# Altium PCB Teeth_Radiology_PCB.PcbDoc (part 1 of 2)
Units mm, origin at the board's own origin, x right, y up, seen from the top; angles counter-clockwise.
Board outline 199.64 x 96.9 mm, 2 copper layers (Top Layer, Bottom Layer); 127 components, 118 nets, 427 pads, 81 vias.
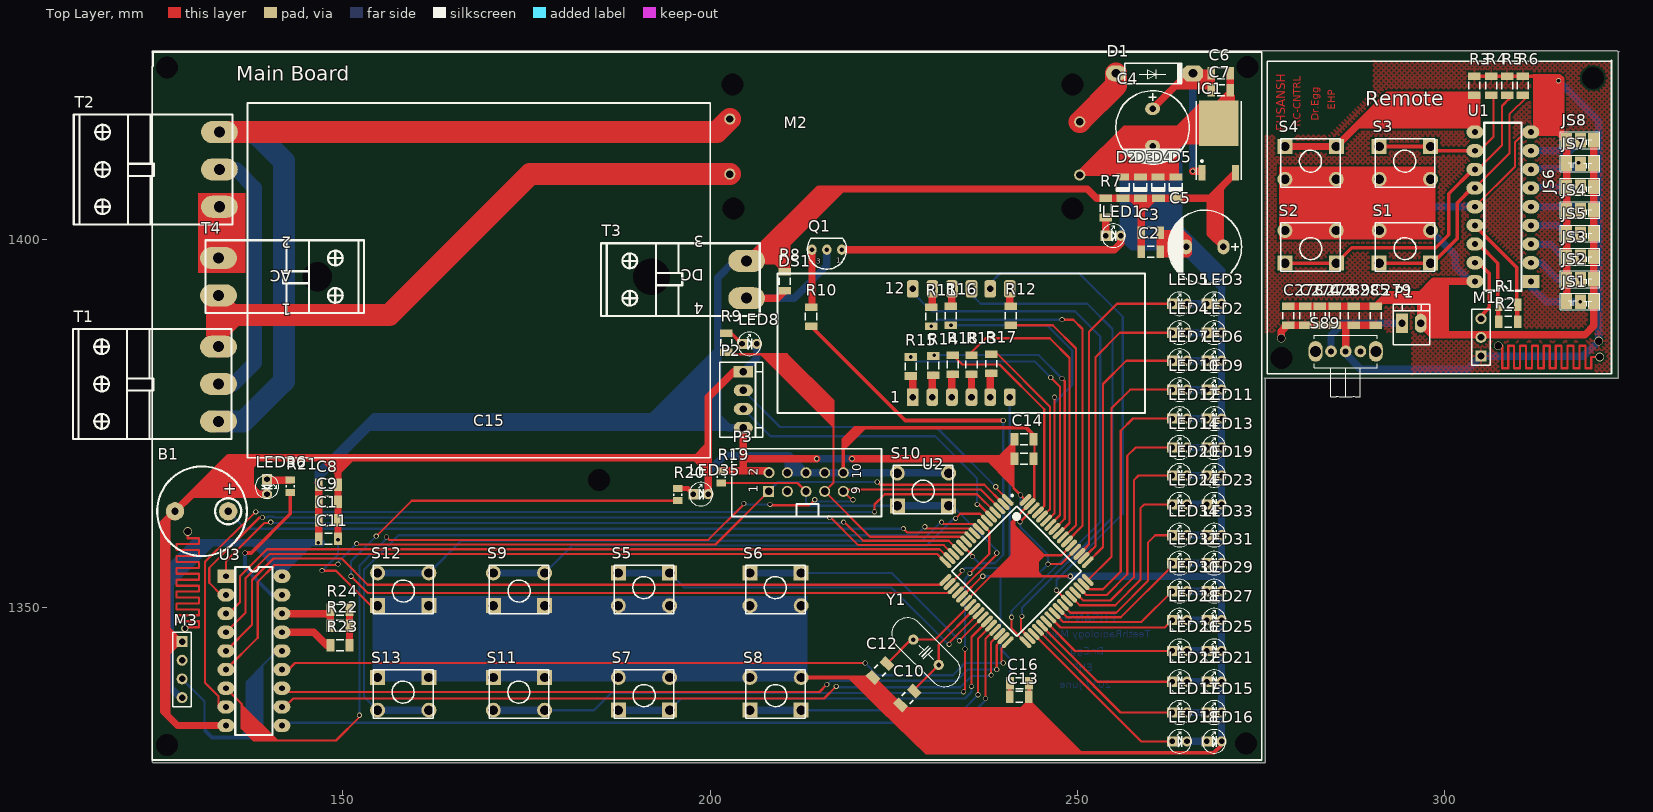
[diagram p0: Top Layer view]
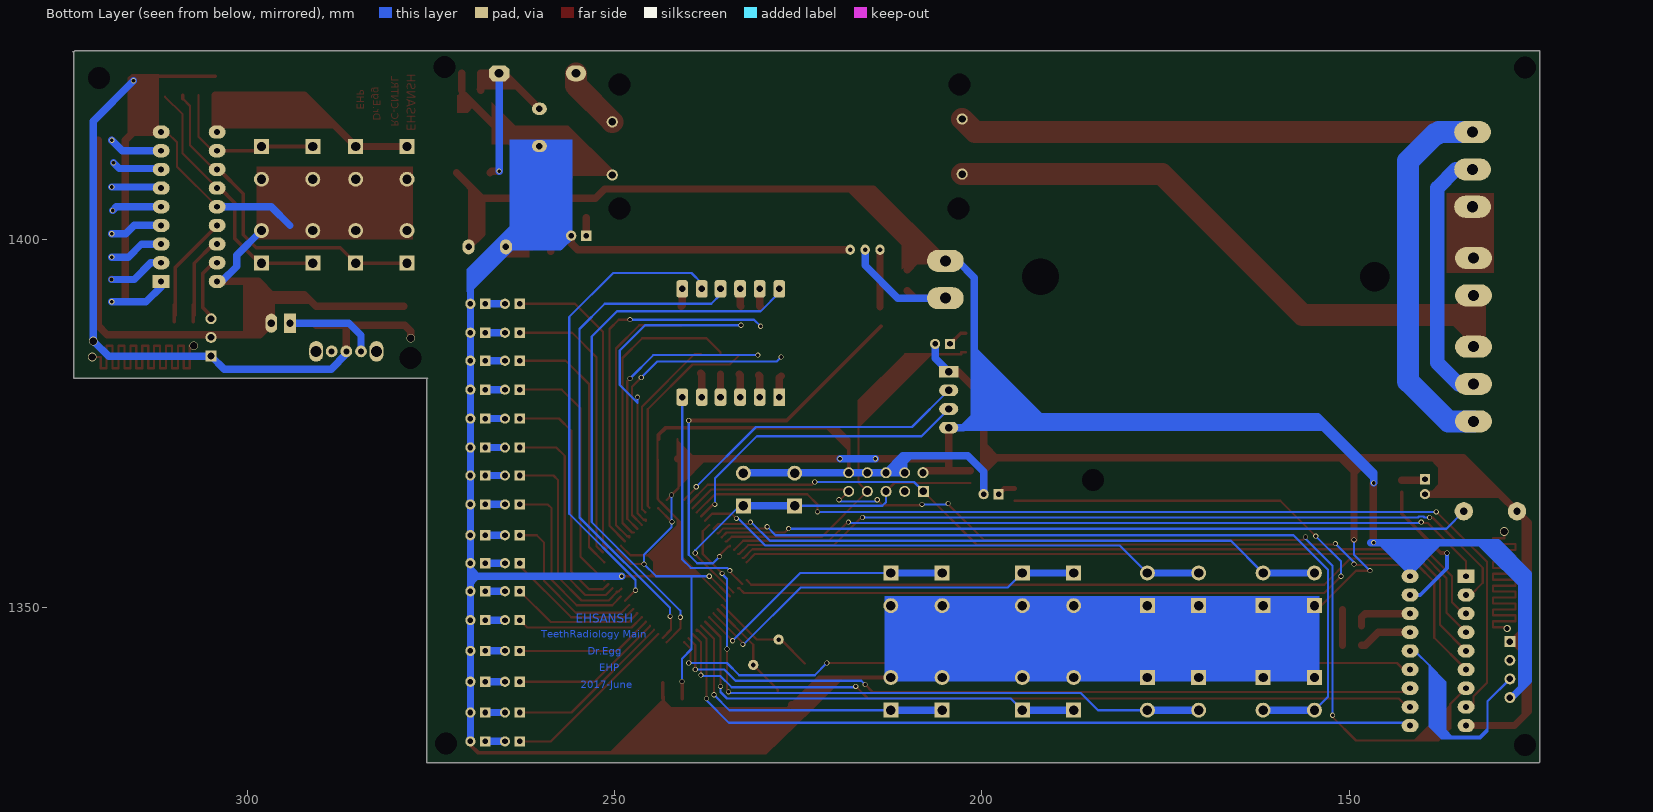
[diagram p1: Bottom Layer view, seen from below]
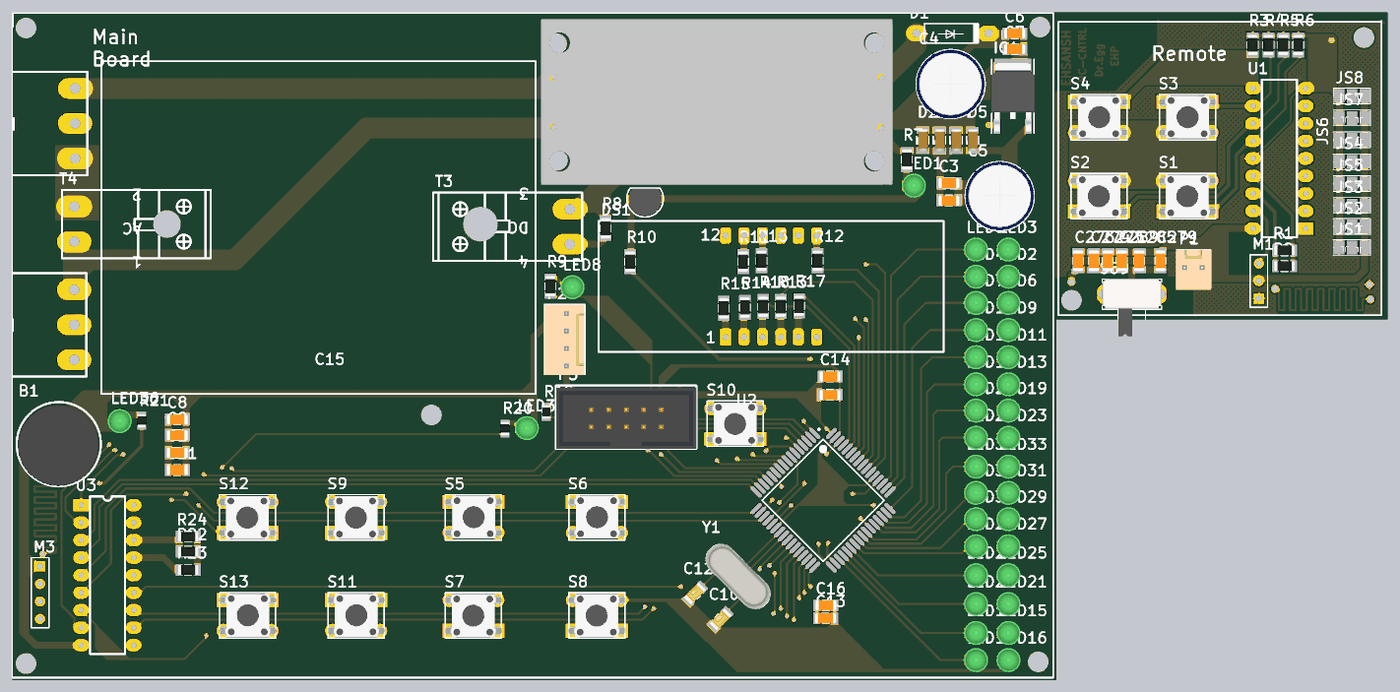
[diagram p3: 3D render of the assembled board from above, using the file's embedded part models]

## Layer stack, top to bottom
Top Solder: solder mask 0.0102, Solder Resist, Dk 3.5
Top Layer: signal copper 0.0356
Dielectric 1: dielectric 0.32, FR-4, Dk 4.8
Bottom Layer: signal copper 0.0356
Bottom Solder: solder mask 0.0102, Solder Resist, Dk 3.5

## Board outline
323.723,1425.575 323.596,1425.448 323.596,1381.125 275.463,1381.125 275.59,1380.998 275.59,1328.801 124.206,1328.801 124.079,1328.928 124.079,1425.702 323.469,1425.702 323.596,1425.575
board region "Default Layer Stack Region": 275.59,1425.702 323.469,1425.702 323.596,1425.575 323.723,1425.575 323.596,1425.448 323.596,1381.125 275.463,1381.125 275.59,1380.998 275.59,1328.801
board region "Default Layer Stack Region": 275.59,1328.801 124.206,1328.801 124.079,1328.928 124.079,1425.702 275.59,1425.702

## Design rules (kind name [scope] priority, off if disabled: settings)
Clearance [All] p1: gap=0.254
PolygonConnect [All] p1: connectstyle=Relief reliefconductorwidth=0.254 reliefentries=4 polygonreliefangle="90 Angle" airgapwidth=0.254
RoutingVias [All] p1: holewidth=0.5 width=0.7 viastyle="Through Hole" minholewidth=0.5 minwidth=0.7 maxholewidth=0.5 maxwidth=0.7
SolderMaskExpansion [All] p1: expansion=0.102
Width [All] p1: maxlimit=10 minlimit=0.254 preferedwidth=5
30 further rules are at their usual default settings.

## Components (designator, comment, footprint, x,y, rotation, side; value= is the part's Value field where it differs from the comment)
B1 "Buzzer" Buzzer 130.556,1363.345 r0 top
C1 "10u" SMD_CAP_1206 146.756,1361.821 r0 top
C2 "10u" SMD_CAP_1206 258.676,1398.397 r0 top
C3 "100nF" SMD_CAP_1206 258.676,1400.937 r0 top
C4 "1uF" "cap 04" 260.223,1415.288 r90 top
C5 "1uF" "cap 04" 267.335,1399.032 r0 top
C6 "10u" SMD_CAP_1206 268.224,1422.654 r0 top
C7 "100nF" SMD_CAP_1206 268.224,1420.368 r0 top
C8 "10u" SMD_CAP_1206 146.756,1366.647 r0 top
C9 "100nF" SMD_CAP_1206 146.756,1364.361 r0 top
C10 "18pF" "CAP 1206 (3216X15L)" 226.858,1337.632 r45 top
C11 "100nF" SMD_CAP_1206 149.352,1359.281 r180 top
C12 "18pF" "CAP 1206 (3216X15L)" 223.139,1341.374 r45 top
C13 "10uF" SMD_CAP_1206 240.792,1337.818 r0 top
C14 "10u" SMD_CAP_1206 241.427,1372.87 r0 top
C15 "10u" SMD_CAP_1206 241.427,1370.203 r0 top
C16 "100nF" SMD_CAP_1206 240.828,1339.664 r0 top
C273 "100nF" SMD_CAP_1206 278.694,1388.364 r90 top
C274 "10u" SMD_CAP_1206 280.98,1388.364 r90 top
C275 "10u" SMD_CAP_1206 283.012,1388.364 r90 top
C279 "10u" SMD_CAP_1206 290.632,1388.364 r90 top
C285 "10u" SMD_CAP_1206 287.584,1388.364 r90 top
C289 "100nF" SMD_CAP_1206 285.044,1388.364 r90 top
D1 "1N4007" My_DO-41 265.938,1422.908 r180 top
D2 "Diode Zener SMD" DIOMELF3615N 256.159,1407.16 r90 top
D3 "Diode Zener SMD" DIOMELF3615N 258.572,1407.16 r90 top
D4 "Diode Zener SMD" DIOMELF3615N 260.985,1407.16 r90 top
D5 "Diode Zener SMD" DIOMELF3615N 263.398,1407.16 r90 top
DS1 "7Segment-4Digit-CA" 7segCA 209.169,1376.426 r0 top
IC1 "L78M05" TO-252 269.24,1412.494 r0 top
JS1 "JumperSMD 3Pin" "JumperSMD 3Pin" 319.461,1391.539 r90 top
JS2 "JumperSMD 3Pin" "JumperSMD 3Pin" 319.461,1394.587 r90 top
JS3 "JumperSMD 3Pin" "JumperSMD 3Pin" 319.461,1397.635 r90 top
JS4 "JumperSMD 3Pin" "JumperSMD 3Pin" 319.461,1403.985 r90 top
JS5 "JumperSMD 3Pin" "JumperSMD 3Pin" 319.461,1400.81 r90 top
JS6 "JumperSMD 3Pin" "JumperSMD 3Pin" 319.461,1407.16 r90 top
JS7 "JumperSMD 3Pin" "JumperSMD 3Pin" 319.461,1410.335 r90 top
JS8 "JumperSMD 3Pin" "JumperSMD 3Pin" 319.461,1413.51 r90 top
LED1 "Red" LED-3mm 254.889,1400.556 r0 top
LED2 "Red" LED-3mm 268.605,1387.348 r0 top
LED3 "Red" LED-3mm 268.605,1391.285 r0 top
LED4 "Red" LED-3mm 263.906,1387.348 r0 top
LED5 "Red" LED-3mm 263.906,1391.285 r0 top
LED6 "Red" LED-3mm 268.605,1383.538 r0 top
LED7 "Red" LED-3mm 263.906,1383.538 r0 top
LED8 "Red" LED-3mm 205.359,1385.824 r0 top
LED9 "Red" LED-3mm 268.605,1379.601 r0 top
LED10 "Red" LED-3mm 263.906,1379.601 r0 top
LED11 "Red" LED-3mm 268.605,1375.664 r0 top
LED12 "Red" LED-3mm 263.906,1375.664 r0 top
LED13 "Red" LED-3mm 268.605,1371.727 r0 top
LED14 "Red" LED-3mm 263.906,1371.727 r0 top
LED15 "Red" LED-3mm 268.605,1335.659 r0 top
LED16 "Red" LED-3mm 268.605,1331.722 r0 top
LED17 "Red" LED-3mm 263.906,1335.659 r0 top
LED18 "Red" LED-3mm 263.906,1331.722 r0 top
LED19 "Red" LED-3mm 268.605,1367.917 r0 top
LED20 "Red" LED-3mm 263.906,1367.917 r0 top
LED21 "Red" LED-3mm 268.605,1339.85 r0 top
LED22 "Red" LED-3mm 263.906,1339.85 r0 top
LED23 "Red" LED-3mm 268.605,1363.98 r0 top
LED24 "Red" LED-3mm 263.906,1363.98 r0 top
LED25 "Red" LED-3mm 268.605,1344.041 r0 top
LED26 "Red" LED-3mm 263.906,1344.041 r0 top
LED27 "Red" LED-3mm 268.605,1348.232 r0 top
LED28 "Red" LED-3mm 263.906,1348.232 r0 top
LED29 "Red" LED-3mm 268.605,1352.169 r0 top
LED30 "Red" LED-3mm 263.906,1352.169 r0 top
LED31 "Red" LED-3mm 268.605,1355.979 r0 top
LED32 "Red" LED-3mm 263.906,1355.979 r0 top
LED33 "Red" LED-3mm 268.605,1359.789 r0 top
LED34 "Red" LED-3mm 263.906,1359.789 r0 top
LED35 "Red" LED-3mm 198.755,1365.377 r0 top
LED36 "Red" LED-3mm 139.7,1366.393 r270 top
M1 "FSK_Transmit" FSK_TRA 304.927,1384.173 r90 top
M2 "220-12 Medule" "AC-DC 220-12" 200.66,1400.81 r0 top
M3 "FSK_Receive" FSK_RES 128.143,1342.771 r270 top
P1 "LHWR" "Polarized Header 2" 295.458,1388.872 r0 top
P2 "LHWR" "Polarized Header 4" 204.724,1378.204 r270 top
P3 "BoxHeader 2x5" "Box Header 2x5" 215.646,1365.758 r90 top
Q1 "C945" C945 215.9,1398.651 r0 top
R1 "10K" "RES 1206 (3216X08L)" 309.936,1391.158 r180 top
R2 "10K" "RES 1206 (3216X08L)" 309.936,1388.872 r180 top
R3 "10K" "RES 1206 (3216X08L)" 304.038,1422.273 r270 top
R4 "10K" "RES 1206 (3216X08L)" 306.324,1422.273 r270 top
R5 "10K" "RES 1206 (3216X08L)" 308.483,1422.273 r270 top
R6 "10K" "RES 1206 (3216X08L)" 310.642,1422.273 r270 top
R7 "330" "RES 1206 (3216X08L)" 253.873,1405.636 r270 top
R8 "1K" "RES 1206 (3216X08L)" 210.185,1393.063 r90 top
R9 "330" "RES 1206 (3216X08L)" 202.184,1384.681 r90 top
R10 "330" "RES 1206 (3216X08L)" 213.741,1388.237 r90 top
R11 "330" "RES 1206 (3216X08L)" 230.124,1388.237 r90 top
R12 "330" "RES 1206 (3216X08L)" 240.919,1388.364 r90 top
R13 "330" "RES 1206 (3216X08L)" 235.585,1384.3 r270 top
R14 "330" "RES 1206 (3216X08L)" 230.378,1384.173 r270 top
R15 "330" "RES 1206 (3216X08L)" 227.33,1384.046 r270 top
R16 "330" "RES 1206 (3216X08L)" 232.791,1388.364 r90 top
R17 "330" "RES 1206 (3216X08L)" 238.252,1384.427 r270 top
R18 "330" "RES 1206 (3216X08L)" 233.045,1384.3 r270 top
R19 "10K" "RES 0805 (2012X06L)" 201.549,1368.552 r270 top
R20 "330" "RES 0805 (2012X06L)" 195.58,1364.488 r90 top
R21 "330" "RES 0805 (2012X06L)" 142.875,1365.631 r90 top
R22 "1K" "RES 1206 (3216X08L)" 148.336,1347.47 r0 top
R23 "330" "RES 1206 (3216X08L)" 150.932,1344.803 r180 top
R24 "1K" "RES 1206 (3216X08L)" 148.336,1349.629 r0 top
S1 "Switch PB" "Switch - Push to On" 294.569,1399.032 r180 top
S2 "Switch PB" "Switch - Push to On" 281.742,1399.032 r180 top
S3 "Switch PB" "Switch - Push to On" 294.569,1410.462 r0 top
S4 "Switch PB" "Switch - Push to On" 281.742,1410.462 r0 top
S5 "Switch PB" "Switch - Push to On" 191.008,1352.423 r0 top
S6 "Switch PB" "Switch - Push to On" 208.915,1352.423 r0 top
S7 "Switch PB" "Switch - Push to On" 191.008,1338.199 r180 top
S8 "Switch PB" "Switch - Push to On" 208.915,1338.199 r180 top
S9 "Switch PB" "Switch - Push to On" 173.99,1352.423 r180 top
S10 "Switch PB" "Switch - Push to On" 228.981,1366.012 r180 top
S11 "Switch PB" "Switch - Push to On" 173.99,1338.199 r0 top
S12 "Switch PB" "Switch - Push to On" 158.242,1352.423 r180 top
S13 "Switch PB" "Switch - Push to On" 158.242,1338.199 r0 top
S89 "Switch SPDT_Subminiator" "SPDT Subminiator" 286.512,1384.808 r180 top
T1 "PHONIX3" PHONIX3 133.096,1375.283 r90 top
T2 "PHONIX3" PHONIX3 133.223,1404.493 r90 top
T3 "PHONIX2" PHONIX2 204.978,1397.127 r90 top
T4 "PHONIX2" PHONIX2 133.096,1392.428 r270 top
U1 "PT2262" PT2262 312.222,1419.733 r180 top
U2 "ATmega64A-AU" 64A_M 241.717,1354.904 r315 top
U3 "PT2272" DIP18 134.112,1354.201 r0 top
Y1 "16MHz" "XTAL Small" 229.398,1343.855 r135 top

## Footprints (in the part's own frame and the unit in brackets; to place one, negate y for a bottom-side part, rotate by r counter-clockwise, add the part's x,y. Pads: shape width x height; smd on the part's side, far side on the other; paste and mask are expansions set on the pad)
7segCA [mm] "7seg-CA; 12 Leads"
  rect 1.6x2.4 hole 0.9: 1(18.415,2.159)
  rrect50% 1.6x2.4 hole 0.9: 2(21.082,2.159) 3(23.749,2.159) 4(26.416,2.159) 5(28.956,2.159) 6(31.623,2.159) 7(31.623,16.891) 8(28.956,16.891) 9(26.416,16.891) 10(23.749,16.891) 11(21.082,16.891) 12(18.415,16.891)
  silkscreen extent 0,0 50.04,19
64A_M [mm] "Thin QFP, 64-Leads, Body 14x14mm, Pitch 0.8mm, IPC Low Density"
  oval 2.05x0.6 smd: 1(-7.7,6) 2(-7.7,5.2) 3(-7.7,4.4) 4(-7.7,3.6) 5(-7.7,2.8) 6(-7.7,2) 7(-7.7,1.2) 8(-7.7,0.4) 9(-7.7,-0.4) 10(-7.7,-1.2) 11(-7.7,-2) 12(-7.7,-2.8) 13(-7.7,-3.6) 14(-7.7,-4.4) 15(-7.7,-5.2) 16(-7.7,-6) 33(7.7,-6) 34(7.7,-5.2) 35(7.7,-4.4) 36(7.7,-3.6) 37(7.7,-2.8) 38(7.7,-2) 39(7.7,-1.2) 40(7.7,-0.4) 41(7.7,0.4) 42(7.7,1.2) 43(7.7,2) 44(7.7,2.8) 45(7.7,3.6) 46(7.7,4.4) 47(7.7,5.2) 48(7.7,6)
  oval 0.6x2.05 smd: 17(-6,-7.7) 18(-5.2,-7.7) 19(-4.4,-7.7) 20(-3.6,-7.7) 21(-2.8,-7.7) 22(-2,-7.7) 23(-1.2,-7.7) 24(-0.4,-7.7) 25(0.4,-7.7) 26(1.2,-7.7) 27(2,-7.7) 28(2.8,-7.7) 29(3.6,-7.7) 30(4.4,-7.7) 31(5.2,-7.7) 32(6,-7.7) 49(6,7.7) 50(5.2,7.7) 51(4.4,7.7) 52(3.6,7.7) 53(2.8,7.7) 54(2,7.7) 55(1.2,7.7) 56(0.4,7.7) 57(-0.4,7.7) 58(-1.2,7.7) 59(-2,7.7) 60(-2.8,7.7) 61(-3.6,7.7) 62(-4.4,7.7) 63(-5.2,7.7) 64(-6,7.7)
  silkscreen extent -7.82,-6.25 6.25,6.97, body extent -7,-7 7,7, height 1.2
"AC-DC 220-12" [mil]
  round 60 hole 39.37: 0(1955,600) 1(1955,315) 2(80,615) 3(80,320)
  round 60 hole 118.11: 4(1915,135) 5(1915,800) 6(95,800) 7(100,135)
  body extent 6,-5 2014,940, height 118
"Box Header 2x5" [mm]
  rect 1.5x1.5 hole 1: 1(-0.006,7.666)
  round 1.5 hole 1: 2(2.54,7.62) 3(-0.006,5.126) 4(2.534,5.126) 5(-0.006,2.586) 6(2.534,2.586) 7(-0.006,0.046) 8(2.534,0.046) 9(-0.006,-2.494) 10(2.534,-2.494)
  silkscreen extent -3.42,-7.7 5.8,12.7, body extent -3.4,-7.7 5.7,12.66, height 9.43
Buzzer [mm] "Magnetic Transducer"
  round 2.5 hole 1: 1(3.859,-0.297) 2(-3.38,-0.297)
  silkscreen extent -5.79,-6.4 6.4,5.8, body extent -5.67,-6.39 6.17,5.45, height 6.98
C945 [mil] "NPN Transistor"
  oval 50x55 hole 25: 1(80,0) 2(0,0) 3(-80,0)
  silkscreen extent -105,-105 105,61, body extent -94,-96 95,58, height 315
"cap 04" [mil]
  oval 65x80 hole 35: 1(100,0) 2(-100,0)
  silkscreen extent -197,-197 197,197, body extent -198,-197 198,199, height 513
"CAP 1206 (3216X15L)" [mm] "Chip Capacitor, 2-Leads, Body 3.2x1.6mm, IPC High Density"
  rect 1.15x1.75 smd: 1(-1.325,0) 2(1.325,0)
  silkscreen extent -0.35,-0.77 0.35,0.77, body extent -1.6,-0.8 1.6,0.8, height 1
DIOMELF3615N [mm] "MELF Diode, 2-Leads, Body 3.6x1.5mm, IPC Medium Density"
  rect 1x1.75 smd: 1(-1.495,-0.03) 2(1.38,-0.005)
  silkscreen extent -0.55,-0.87 0.55,0.87, body extent -1.61,-0.83 1.54,0.67, height 1.45
DIP18 [mm]
  rect 2.3x1.8 hole 0.8: 1(0,0)
  oval 2.3x1.8 hole 0.8: 2(0,-2.54) 3(0,-5.08) 4(0,-7.62) 5(0,-10.16) 6(0,-12.7) 7(0,-15.24) 8(0,-17.78) 9(0,-20.32) 10(7.62,-20.32) 11(7.62,-17.78) 12(7.62,-15.24) 13(7.62,-12.7) 14(7.62,-10.16) 15(7.62,-7.62) 16(7.62,-5.08) 17(7.62,-2.54) 18(7.62,0)
  silkscreen extent 1.27,-21.59 6.35,1.27
FSK_RES [mm]
  rect 1.5x1.5 hole 0.9: 0(-2.54,0)
  round 1.5 hole 0.9: 1(0,0) 2(2.54,0) 3(5.08,0)
  silkscreen extent -3.81,-1.27 6.35,1.27
FSK_TRA [mm]
  rect 1.5x1.5 hole 0.9: 0(0,0)
  round 1.5 hole 0.9: 1(2.54,0) 2(5.08,0)
  silkscreen extent -1.27,-1.27 6.35,1.27
"JumperSMD 3Pin" [mm]
  rect 2x1.5 smd: 1(0.051,2.87) 2(0.025,1.016) 3(0.051,-0.813)
  silkscreen extent -1.09,-1.66 1.18,3.77
LED-3mm [mil]
  rect 55x55 hole 30: 1(-40,0)
  round 55 hole 30: 2(40,0)
  silkscreen extent -63,-63 63,63, body extent -69,-69 69,69, height 154
My_DO-41 [mil]
  oval 110x85 hole 47.24: A(420.71,10)
  oct 110x85 hole 47.24: K(8.9,10)
  silkscreen extent 64,-45 375,65
PHONIX2 [mm]
  oval 3x5 hole 1.5: 1(0,0) 2(-5.08,0)
  silkscreen extent -7.49,-1.78 2.41,19.81
PHONIX3 [mm]
  oval 3x5 hole 1.5: 1(0,0) 2(5.08,0) 3(10.16,0)
  silkscreen extent -2.41,-1.78 12.57,19.81
"Polarized Header 2" [mm]
  rect 1.6x2.6 hole 1: 1(-1.28,-0.23)
  oval 1.6x2.6 hole 1: 2(1.26,-0.23)
  silkscreen extent -2.47,-3.15 2.48,2.37, body extent -2.57,-3.43 2.51,2.37, height 10.75
"Polarized Header 4" [mm]
  rect 1.6x2.6 hole 1: 1(-3.84,-0.2)
  oval 1.6x2.6 hole 1: 2(-1.3,-0.2) 3(1.24,-0.2) 4(3.78,-0.2)
  silkscreen extent -5.1,-3.42 5.05,2.45, body extent -5.06,-3.42 5.1,2.38, height 10.75
PT2262 [mm]
  rect 2.3x1.8 hole 0.8: 1(0.508,25.4)
  oval 2.3x1.8 hole 0.8: 2(0.508,22.86) 3(0.508,20.32) 4(0.508,17.78) 5(0.508,15.24) 6(0.508,12.7) 7(0.508,10.16) 8(0.508,7.62) 9(0.508,5.08) 10(8.128,5.08) 11(8.128,7.62) 12(8.128,10.16) 13(8.128,12.7) 14(8.128,15.24) 15(8.128,17.78) 16(8.128,20.32) 17(8.128,22.86) 18(8.128,25.4)
  silkscreen extent 1.78,3.81 6.86,26.67
"RES 0805 (2012X06L)" [mm] "Chip Resistor, 2-Leads, Body 2.0x1.3mm, IPC High Density _ (0.100 W)"
  rect 0.95x1.3 smd: 1(0,0) 2(1.65,0)
  silkscreen extent 0.67,-0.55 0.97,0.55, body extent -0.19,-0.63 1.84,0.64, height 0.6
"RES 1206 (3216X08L)" [mm] "Chip Resistor, 2-Leads, Body 3.2x1.6mm, IPC High Density _ (0.125 W)"
  rect 1.05x1.7 smd: 1(0,0) 2(2.596,0)
  silkscreen extent 0.8,-0.75 1.8,0.75, body extent -0.23,-0.76 2.82,0.76, height 0.6
SMD_CAP_1206 [mm]
  rect 1.05x1.7 smd: 1(0,0) 2(2.596,0)
  silkscreen extent 0.8,-0.75 1.8,0.75, body extent -0.22,-0.77 2.82,0.75, height 0.75
"SPDT Subminiator" [mm] "Subminiator SPDT switch"
  round 1.6 hole 0.8: 1(2,0) 2(0,0) 3(-2,0)
  oval 1.9x2.8 hole 1.5: M2(-4.1,0) M2(4.1,0)
  silkscreen extent -4.3,-2.2 4.3,6.2, body extent -4.31,-2.28 4.3,6.09, height 4.7
"Switch - Push to On" [mil]
  rect 80x80 hole 50: 1(-137.5,87.5) 1(137.5,87.5)
  round 80 hole 50: 2(-137.5,-87.5) 2(137.5,-87.5)
  silkscreen extent -160,-130 160,130, body extent -155,-121 157,123, height 205
TO-252 [mm] "D-PAK/TO-252-AA; 3 Leads (1 Cropped); Body 10.1 (inc. leads) x 6.6 mm (LxW max)"
  rect 1x2.1 smd: 1(-2.285,-3.375) 3(2.285,-3.375)
  rect 5.4x6.2 smd: 4(0,3.375)
  silkscreen extent -3.08,-4.32 3.09,6.38, body extent -3.27,-4.11 3.27,5.83, height 2.39
"XTAL Small" [mil]
  round 55 hole 25: 1(-96.06,0) 2(96.06,0)
  silkscreen extent -225,-85 225,85, body extent -226,-89 226,89, height 140

## Part data
C1 C2 C3 C6 C7 C8 C9 C10 C11 C12 C13 C14 C15 C16 C273 C274 C275 C279 C285 C289: library part Cap-Bipolar, "Bipolar Capacitor"
C4 C5: library part Cap-Polar, "Polar Capacitor"
D1: "1 Amp Diode"
DS1: library part 7Seg-4Digit-CA, "7-Segment Display: CA"
IC1: "Precision 500mA Regulator"
LED1 LED2 LED3 LED4 LED5 LED6 LED7 LED8 LED9 LED10 LED11 LED12 LED13 LED14 LED15 LED16 LED17 LED18 LED19 LED20 LED21 LED22 LED23 LED24 LED25 LED26 LED27 LED28 LED29 LED30 LED31 LED32 LED33 LED34 LED35 LED36: library part LED, "LED"
P1: library part "2pin LHWR"
P2: library part "4pin LHWR"
Q1: "NPN Transistor"
R1 R2 R3 R4 R5 R6 R7 R8 R9 R10 R11 R12 R13 R14 R15 R16 R17 R18 R19 R20 R21 R22 R23 R24: library part Resistor, "Resistor"
S1 S2 S3 S4 S5 S6 S7 S8 S9 S10 S11 S12 S13: "Push Button Switch"
S89: "Subminiator SPDT Switch"
U2: "8-bit AVR Microcontroller, 64KB Flash, 2KB EEPROM, 4KB SRAM, 64-pin TQFP, Industrial Grade (-40°C to 85°C)"
Y1: library part XTAL, "XTAL Crystal"

## Free pads (board coordinates)
  round 1.524 hole 5: 0(192.024,1394.968)
  round 1.524 hole 4: 1(146.558,1394.968)
  round 1.524 hole 3: 2(272.923,1331.468) 4(273.177,1423.543) 5(126.111,1423.416) 6(126.111,1331.214) 7(184.912,1367.282) 8(320.167,1422.019) 9(277.749,1383.919)

## Via types
v1: diameter 0.7, hole 0.5, Top Layer to Bottom Layer, 75 vias
v2: diameter 1.2, hole 1, Top Layer to Bottom Layer, 5 vias
v3: diameter 1, hole 0.7, Top Layer to Bottom Layer, 1 vias

## Nets (pads, with @x,y where several pads share a name; then routed paths per layer and width w, separated by ;. In a path a pad name is that pad's centre, name@x,y a point inside that pad or via, vN(x,y) a via of type N, cw(c..) or ccw(c..) an arc to the next point about the centre after c; other vN are vias at no path point)
+12: C4.1 C6.1 C7.1 D1.K IC1.1 | length 26.8
  Top Layer w1: C4.1@260.223,1417.828 265.049,1422.654 D1.K@265.712,1422.654 C6.1@268.097,1422.654 ; v1(265.712,1409.347) 266.727,1409.347 IC1.1@266.955,1409.119 ; C7.1@268.224,1420.368 C6.1@268.224,1422.654
  Bottom Layer w1: v1(265.712,1409.347) D1.K@265.712,1422.654
A0: U2.13 U3.1 | length 105.2
  Top Layer w0.3: U3.1@134.112,1354.201 134.112,1356.233 139.327,1361.448 140.089,1361.448 v1(140.208,1361.567) ; v1(218.186,1361.567) 218.313,1361.567 220.853,1359.027 232.503,1359.027 U2.13@233.727,1357.804
  Bottom Layer w0.3: v1(140.208,1361.567) 140.327,1361.448 v1@217.924,1361.448
A1: U2.14 U3.2 | length 111.1
  Top Layer w0.3: U3.2@134.112,1351.661 133.477,1351.661 131.826,1353.312 131.826,1355.344 138.684,1362.202 v1(139.065,1362.202) ; v1(216.281,1362.202) 216.408,1362.202 220.172,1358.438 231.825,1358.438 233.025,1357.238 U2.14@233.161,1357.238
  Bottom Layer w0.3: v1(139.065,1362.202) 139.777,1362.202 139.896,1362.321 140.52,1362.321 140.639,1362.202 215.9,1362.202 v1@216.027,1362.329
A2: U2.15 U3.3 | length 104.7
  Top Layer w0.3: U3.3@134.112,1349.121 134.493,1349.121 136.017,1350.645 136.017,1354.201 139.7,1357.884 231.248,1357.884 232.459,1356.672 U2.15@232.595,1356.672
A3: U2.16 U3.4 | length 105.6
  Top Layer w0.3: U3.4@134.112,1346.581 136.779,1349.248 136.779,1353.947 140.081,1357.249 230.887,1357.249 U2.16@232.029,1356.106
A4: U2.17 U3.5 | length 108.4
  Top Layer w0.3: U3.5@134.112,1344.041 137.668,1347.597 137.668,1353.693 140.589,1356.614 149.86,1356.614 153.416,1353.058 231.394,1353.058 232.029,1353.693 U2.17@232.029,1353.702
A5: P3.1 U2.2 U3.6 | length 122.4
  Top Layer w0.3: U3.6@134.112,1341.501 138.43,1345.819 138.43,1353.439 140.716,1355.725 149.225,1355.725 v1(149.352,1355.852) ; v1(151.892,1358.646) 152.019,1358.519 200.747,1358.519 P3.1@207.98,1365.752 ; v1(222.758,1367.028) 223.139,1366.647 237.328,1366.647 U2.2@239.949,1364.026
  Bottom Layer w0.3: v1(149.352,1355.852) 149.352,1356.106 v1(151.892,1358.646) ; P3.1@207.98,1365.752 209.256,1367.028 v1(222.758,1367.028)
A6: P3.9 U2.3 U3.7 | length 141.2
  Top Layer w0.3: U3.7@134.112,1338.961 136.271,1336.802 136.271,1333.5 137.922,1331.849 149.098,1331.849 152.4,1335.151 v1(152.273,1335.278) ; v1(155.956,1359.535) 156.337,1359.154 199.771,1359.154 204.597,1363.98 v1(204.597,1364.107) ; v1(208.153,1363.98) 208.28,1363.853 213.487,1363.853 v1(214.249,1364.615) ; v1(219.456,1364.615) 219.277,1364.615 P3.9@218.14,1365.752 218.4,1366.012 236.832,1366.012 U2.3@239.383,1363.46
  Bottom Layer w0.3: v1(152.273,1335.278) 152.273,1355.598 156.083,1359.408 v1(155.956,1359.535) ; v1@204.724,1363.98 v1(208.153,1363.98) ; v1(214.249,1364.615) 214.249,1364.361 219.202,1364.361 v1(219.456,1364.615)
A7: U2.4 U3.8 | length 134.5
  Top Layer w0.3: U3.8@134.112,1336.421 133.096,1336.421 133.096,1337.883 131.272,1339.707 131.272,1356.187 v1(138.176,1362.964) ; v1(222.377,1362.964) 222.377,1363.98 223.774,1365.377 236.335,1365.377 U2.4@238.818,1362.895
  Bottom Layer w0.3: v1(138.176,1362.964) v1(222.377,1362.964)
D0: U2.32 U3.13 | length 103.2
  Top Layer w0.3: U3.13@141.732,1341.501 142.621,1341.501 143.51,1342.39 v1(221.107,1342.39) ; v1(239.903,1342.39) 239.649,1342.644 239.649,1344.351 U2.32@240.515,1345.217
  Bottom Layer w0.3: v1(221.107,1342.39) 222.758,1340.739 233.045,1340.739 234.696,1342.39 v1(239.903,1342.39)
D1: U2.31 U3.12 | length 103.8
  Top Layer w0.3: U3.12@141.732,1338.961 142.24,1338.453 214.884,1338.453 v1(215.9,1339.469) ; v1(239.014,1341.501) 239.014,1344.848 U2.31@239.949,1345.783
  Bottom Layer w0.3: v1(215.9,1339.469) 216.408,1339.977 230.378,1339.977 ; 229.997,1339.977 233.553,1339.977 235.077,1341.501 v1(239.014,1341.501)
D2: U2.30 U3.11 | length 104.5
  Top Layer w0.3: U3.11@141.732,1336.421 142.113,1336.421 143.256,1337.564 215.519,1337.564 v1(217.17,1339.215) ; v1(238.252,1340.739) 238.252,1345.217 U2.30@239.383,1346.348
  Bottom Layer w0.3: v1(217.17,1339.215) 217.297,1339.088 234.061,1339.088 235.585,1340.612 238.125,1340.612 v1(238.252,1340.739)
D3: U2.29 U3.10 | length 107.5
  Top Layer w0.3: U3.10@141.732,1333.881 U3.10@142.113,1334.262 ; v1(237.49,1337.564) 237.49,1345.692 238.576,1346.778 238.818,1346.778 U2.29@238.818,1346.914
  Bottom Layer w0.3: U3.10@142.113,1334.262 234.442,1334.262 237.49,1337.31 v1(237.49,1337.564)
EARTH: T1.2 T2.2 | length 35.8
  Bottom Layer w2: T1.2@133.096,1380.363 135.128,1380.363 138.049,1383.284 138.049,1407.033 135.509,1409.573 T2.2@133.223,1409.573
EX: T2.1 T4.2
GND: B1.2 C1.2 C2.2 C3.2 C4.2 C5.2 C6.2 C7.2 C8.2 C9.2 C10.1 C11.1 C12.1 C13.2 C14.2 C15.2 C16.2 D2.2 D3.2 D4.2 D5.2 IC1.4 LED1.2 LED2.2 LED3.2 LED6.2 LED8.2 LED9.2 LED11.2 LED13.2 LED15.2 LED16.2 LED19.2 LED21.2 LED23.2 LED25.2 LED27.2 LED29.2 LED31.2 LED33.2 LED35.2 LED36.2 M2.1 M3.0 P2.1 P3.4 P3.6 P3.8 P3.10 Q1.1 S5.2 S6.2 S7.2 S8.2 S9.1 S10.2 S11.1 S12.1 S13.1 U2.22 U2.53 U2.63 U3.9 | length 555.5
  Top Layer w0.3: v1(147.193,1354.963) 149.098,1354.963 153.861,1350.2 S12.1@154.749,1350.2 ; U2.22@234.858,1350.874 238.185,1354.201 ; C14.2@244.15,1372.87 244.15,1370.203 244.136,1370.09 244.136,1364.7 244.023,1364.7 244.023,1364.564 U2.63@243.485,1364.026 241.046,1361.587 241.046,1357.062 ; v1(249.047,1354.201) 238.185,1354.201 ; U2.53@249.141,1358.369 247.834,1357.062 241.046,1357.062 ; 238.185,1354.201 241.046,1357.062
  Top Layer w0.5: S8.2@212.407,1340.421 222.218,1340.421 C10.1@225.921,1336.718 ; P3.10@218.14,1368.292 218.14,1372.824 219.71,1374.394 243.078,1374.394 244.023,1373.449 C14.2@244.023,1372.87 ; C10.1@225.921,1336.695 226.449,1336.167 242.824,1336.167 243.388,1336.731 C13.2@243.388,1337.564 ; 242.76,1336.103 248.666,1330.198 268.605,1330.198 269.621,1331.214 LED16.2@269.621,1331.722 ; C13.2@243.388,1337.818 C13.2@243.388,1337.564 ; C16.2@243.424,1339.664 243.424,1337.6 C13.2@243.388,1337.564
  Top Layer w1: 125.73,1345.311 M3.0@128.143,1345.311 ; U3.9@134.112,1333.881 127.508,1333.881 125.603,1335.786 125.603,1361.475 B1.2@127.176,1363.048 129.505,1365.377 ; LED36.2@139.7,1365.377 129.505,1365.377 ; v1(149.352,1359.154) C11.1@149.352,1359.281 C1.2@149.352,1361.821 C9.2@149.352,1364.361 149.352,1370.33 ; 199.644,1370.33 134.458,1370.33 129.505,1365.377 ; LED35.2@199.771,1365.377 199.771,1378.585 203.23,1382.044 P2.1@204.524,1382.044 ; Q1.1@217.932,1398.651 255.016,1398.651 255.905,1399.54 LED1.2@255.905,1400.556 ; C10.1@225.921,1336.695 C10.1@225.921,1336.718 ; M2.1@250.317,1408.811 254.254,1412.748 C4.2@260.223,1412.748 ; D2.2@256.164,1408.54 D3.2@258.577,1408.54 D4.2@260.99,1408.54 D5.2@263.403,1408.54 ; D4.2@260.223,1408.794 C4.2@260.223,1412.748 ; C3.2@261.272,1400.937 261.272,1399.032 C5.2@264.795,1399.032 ; C7.2@270.764,1419.677 270.454,1419.677 263.525,1412.748 C4.2@260.223,1412.748 ; C7.2@270.82,1420.368 C6.2@270.82,1422.654
  Bottom Layer w0.3: v1(147.193,1354.963) 149.352,1357.122 v1(149.352,1359.154)
  Bottom Layer w1: LED35.2@199.771,1365.377 199.771,1368.425 201.93,1370.584 210.768,1370.584 P3.6@213.06,1368.292 ; P2.1@204.524,1382.044 206.375,1383.895 LED8.2@206.375,1385.824 ; P3.4@210.52,1368.292 P3.6@213.06,1368.292 ; S10.2@232.474,1368.235 232.416,1368.292 P3.10@218.14,1368.292 P3.8@215.6,1368.292 P3.6@213.06,1368.292 ; v1(249.047,1354.201) 269.621,1354.201 ; LED1.2@255.905,1400.556 257.429,1399.032 260.223,1399.032 ; C4.2@260.223,1412.748 260.223,1399.032 ; LED16.2@269.621,1331.722 LED15.2@269.621,1335.659 LED21.2@269.621,1339.85 LED25.2@269.621,1344.041 LED27.2@269.621,1348.232 LED29.2@269.621,1352.169 269.621,1354.201 ; 260.223,1399.032 C5.2@264.795,1399.032 265.049,1399.032 269.621,1394.46 LED3.2@269.621,1391.285 LED2.2@269.621,1387.348 LED6.2@269.621,1383.538 LED9.2@269.621,1379.601 LED11.2@269.621,1375.664 LED13.2@269.621,1371.727 LED19.2@269.621,1367.917 LED23.2@269.621,1363.98 LED33.2@269.621,1359.789 LED31.2@269.621,1355.979 269.621,1354.201
L: M2.2 T1.1 T2.3 | length 121.7
  Top Layer w3: T2.3@133.223,1414.653 200.914,1414.653 M2.2@202.692,1416.431
  Bottom Layer w3: T1.1@133.096,1375.283 136.525,1375.283 141.986,1380.744 141.986,1410.716 138.303,1414.399 138.049,1414.399 137.795,1414.653 T2.3@133.223,1414.653
N: M2.3 T1.3 T4.1 | length 80.6
  Top Layer w3: T1.3@133.096,1385.443 133.096,1387.602 135.255,1389.761 156.337,1389.761 175.514,1408.938 M2.3@202.692,1408.938
NetB1_1: B1.1 U2.10 | length 102.5
  Top Layer w0.3: v1(226.314,1360.678) 226.829,1360.163 234.761,1360.163 U2.10@235.424,1359.501
  Bottom Layer w0.3: B1.1@134.415,1363.048 136.785,1360.678 v1(226.314,1360.678)
NetC10_2: C10.2 U2.24 Y1.1 | length 14.6
  Top Layer w0.3: C10.2@227.795,1338.569 227.795,1338.802 Y1.1@231.123,1342.13 231.123,1344.876 U2.24@235.989,1349.742
NetC12_2: C12.2 U2.23 Y1.2 | length 14.7
  Top Layer w0.3: C12.2@224.076,1342.311 227.346,1345.581 Y1.2@227.672,1345.581 230.648,1345.581 235.375,1350.308 U2.23@235.424,1350.308
NetD1_A: D1.A M2.0 | length 8.6
  Top Layer w3: M2.0@250.317,1416.05 255.252,1420.985 D1.A@255.252,1422.654
NetDS1_1: DS1.1 R15.2 | length 3
  Top Layer w1: R15.2@227.33,1381.45 227.584,1381.196 DS1.1@227.584,1378.585
NetDS1_2: DS1.2 R14.2 | length 3
  Top Layer w1: DS1.2@230.251,1378.585 230.251,1381.45 R14.2@230.378,1381.577
NetDS1_3: DS1.3 R18.2 | length 3.2
  Top Layer w1: DS1.3@232.918,1378.585 232.918,1381.577 R18.2@233.045,1381.704
NetDS1_4: DS1.4 R13.2 | length 3.1
  Top Layer w1: DS1.4@235.585,1378.585 R13.2@235.585,1381.704
NetDS1_5: DS1.5 R17.2 | length 3.3
  Top Layer w1: DS1.5@238.125,1378.585 238.125,1381.704 R17.2@238.252,1381.831
NetDS1_6: DS1.6 U2.18 | length 31.9
  Top Layer w0.3: U2.18@232.595,1353.137 232.616,1353.137 234.442,1354.963 v1(234.315,1354.963)
  Bottom Layer w0.3: v1(234.315,1354.963) 234.696,1355.344 239.649,1355.344 240.792,1356.487 DS1.6@240.792,1378.585
NetDS1_7: DS1.7 R12.2 | length 2.4
  Top Layer w1: DS1.7@240.792,1393.317 240.792,1391.087 R12.2@240.919,1390.96
NetDS1_8: DS1.8 U2.43 | length 64.8
  Top Layer w0.3: v1(247.154,1352.296) U2.43@248.576,1350.874
  Bottom Layer w0.3: DS1.8@238.125,1393.317 238.125,1394.079 239.522,1395.476 250.19,1395.476 256.159,1389.507 256.159,1362.71 247.154,1353.705 v1(247.154,1352.296)
NetDS1_9: DS1.9 U2.34 | length 69.6
  Top Layer w0.3: v1(242.443,1348.74) 242.316,1348.613 242.316,1346.951 U2.34@243.485,1345.783
  Bottom Layer w0.3: DS1.9@235.585,1393.317 235.585,1392.555 236.855,1391.285 251.333,1391.285 254.762,1387.856 254.762,1362.202 242.443,1349.883 v1(242.443,1348.74)
NetDS1_10: DS1.10 R16.2 | length 2.4
  Top Layer w1: R16.2@232.791,1390.96 232.918,1391.087 DS1.10@232.918,1393.317
NetDS1_11: DS1.11 R11.2 | length 2.5
  Top Layer w1: R11.2@230.124,1390.833 230.251,1390.96 DS1.11@230.251,1393.317
NetDS1_12: DS1.12 U2.33 | length 75.9
  Top Layer w0.3: v1(241.046,1348.613) 241.046,1347.089 U2.33@242.919,1345.217
  Bottom Layer w0.3: DS1.12@227.584,1393.317 227.584,1392.809 230.124,1390.269 249.682,1390.269 253.111,1386.84 253.111,1361.567 241.046,1349.502 v1(241.046,1348.613)
NetJS1_2: JS1.2 U1.1 | length 8.3
  Bottom Layer w1: U1.1@311.714,1394.333 311.714,1393.622 313.771,1391.564 v1(318.445,1391.564)
NetJS2_2: JS2.2 U1.2 | length 7.7
  Top Layer w1: JS2.2@318.445,1394.612 v1(318.47,1394.587)
  Bottom Layer w1: U1.2@311.714,1396.873 313.111,1396.873 315.397,1394.587 v1(318.47,1394.587)
NetJS3_2: JS3.2 U1.3 | length 7.5
  Bottom Layer w1: U1.3@311.714,1399.413 314.381,1399.413 316.159,1397.635 v1(318.445,1397.635)
NetJS4_2: JS4.2 U1.5 | length 6.8
  Bottom Layer w1: U1.5@311.714,1404.493 317.81,1404.493 v1(318.318,1403.985)
NetJS5_2: JS5.2 U1.4 | length 7.2
  Top Layer w1: v1(318.445,1400.81) JS5.2@318.445,1400.835
  Bottom Layer w1: U1.4@311.714,1401.953 315.397,1401.953 316.54,1400.81 v1(318.445,1400.81)
NetJS6_2: JS6.2 U1.6 | length 6.8
  Bottom Layer w1: U1.6@311.714,1407.033 311.866,1407.185 v1(318.445,1407.185)
NetJS7_2: JS7.2 U1.7 | length 5.9
  Bottom Layer w1: U1.7@312.652,1409.7 317.429,1409.7 v1(318.191,1410.462)
NetJS8_2: JS8.2 U1.8 | length 7.3
  Top Layer w1: v1(318.419,1413.535) JS8.2@318.445,1413.535
  Bottom Layer w1: U1.8@311.714,1412.113 316.997,1412.113 v1(318.419,1413.535)
NetLED1_1: LED1.1 R7.2 | length 2.5
  Top Layer w1: LED1.1@253.873,1400.556 R7.2@253.873,1403.04
NetLED2_1: LED2.1 LED4.2 | length 2.7
  Bottom Layer w1: LED4.2@264.922,1387.348 LED2.1@267.589,1387.348
NetLED3_1: LED3.1 LED5.2 | length 2.7
  Bottom Layer w1: LED5.2@264.922,1391.285 LED3.1@267.589,1391.285
NetLED4_1: LED4.1 U2.50 | length 38.8
  Top Layer w0.3: 251.589,1357.423 252.476,1358.31 252.476,1384.046 255.778,1387.348 LED4.1@262.89,1387.348
NetLED5_1: LED5.1 U2.51 | length 42.6
  Top Layer w0.3: 251.024,1357.989 251.587,1358.552 251.587,1387.475 255.397,1391.285 LED5.1@262.89,1391.285
NetLED6_1: LED6.1 LED7.2 | length 2.7
  Bottom Layer w1: LED7.2@264.922,1383.538 LED6.1@267.589,1383.538
NetLED7_1: LED7.1 U2.49 | length 35.8
  Top Layer w0.3: U2.49@251.407,1356.104 253.492,1358.189 253.492,1380.363 256.667,1383.538 LED7.1@262.89,1383.538
NetLED8_1: LED8.1 R9.2 | length 2.8
  Top Layer w0.5: R9.2@202.184,1387.277 202.89,1387.277 LED8.1@204.343,1385.824
NetLED9_1: LED9.1 LED10.2 | length 2.7
  Bottom Layer w1: LED10.2@264.922,1379.601 LED9.1@267.589,1379.601